# Altium PCB board.PcbDoc
Units mm, origin at the board's own origin, x right, y up, seen from the top; angles counter-clockwise.
Board outline 40.5 x 17.5 mm, 2 copper layers (Top Layer, Bottom Layer); 17 components, 17 nets, 113 pads, 8 vias.
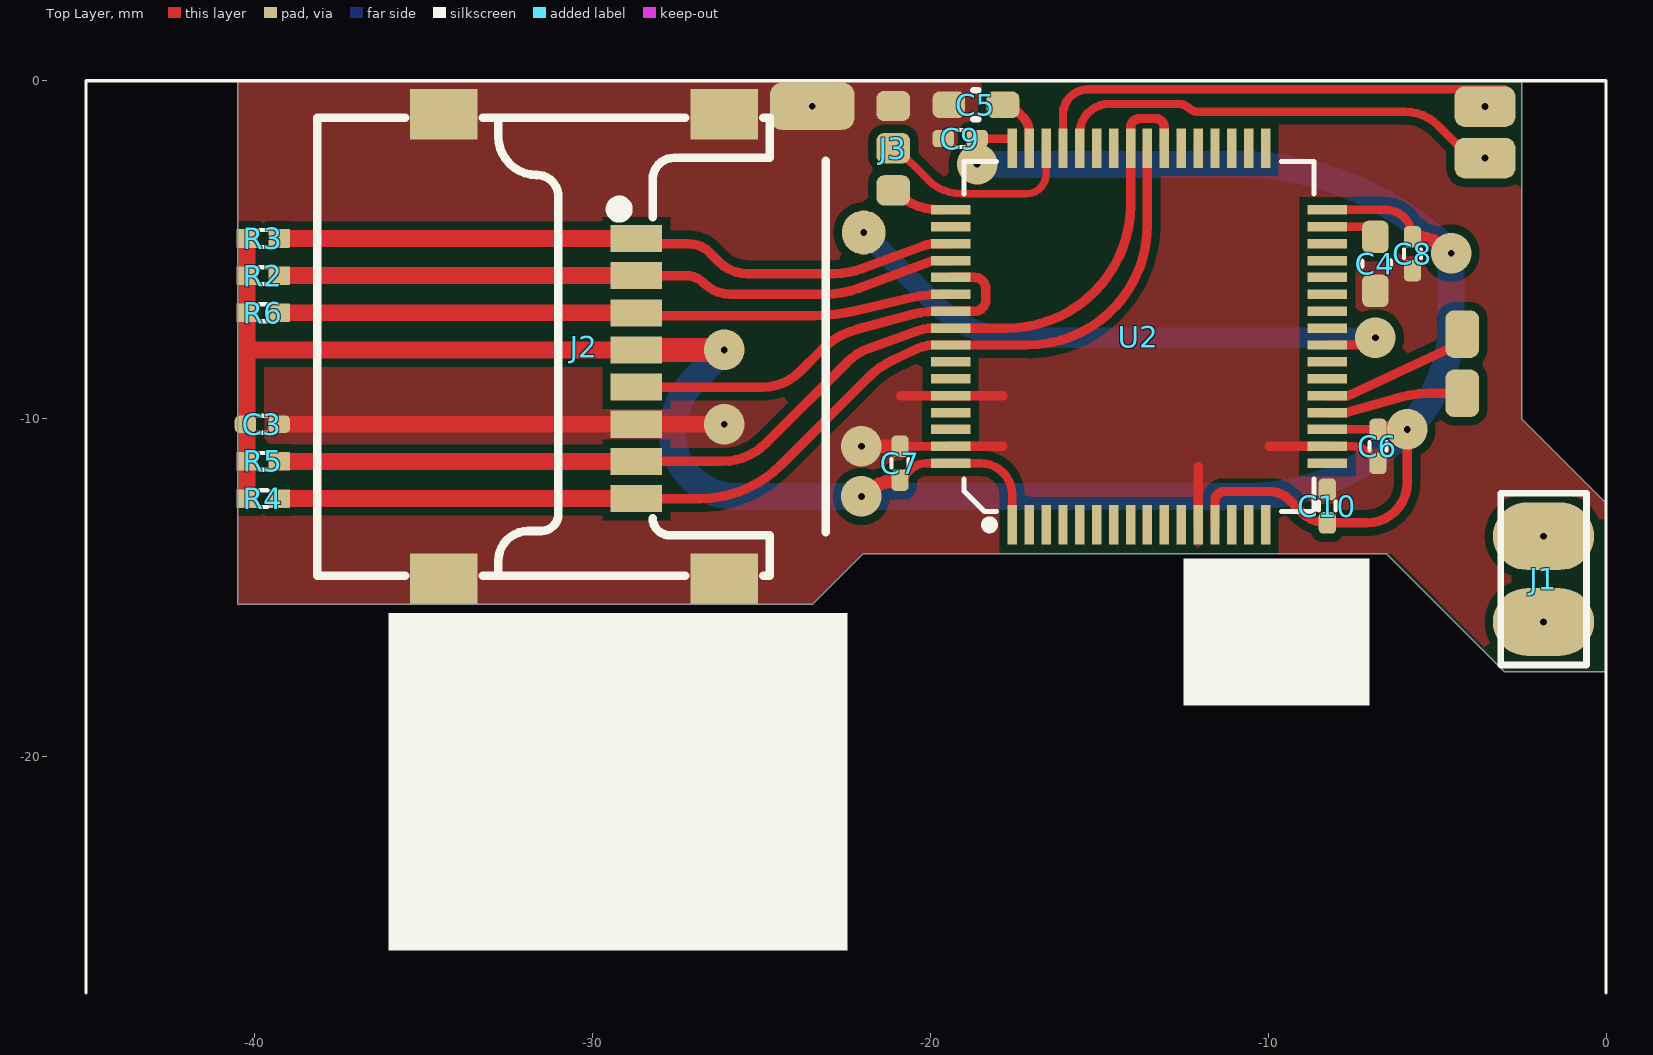
[diagram p0: Top Layer view]
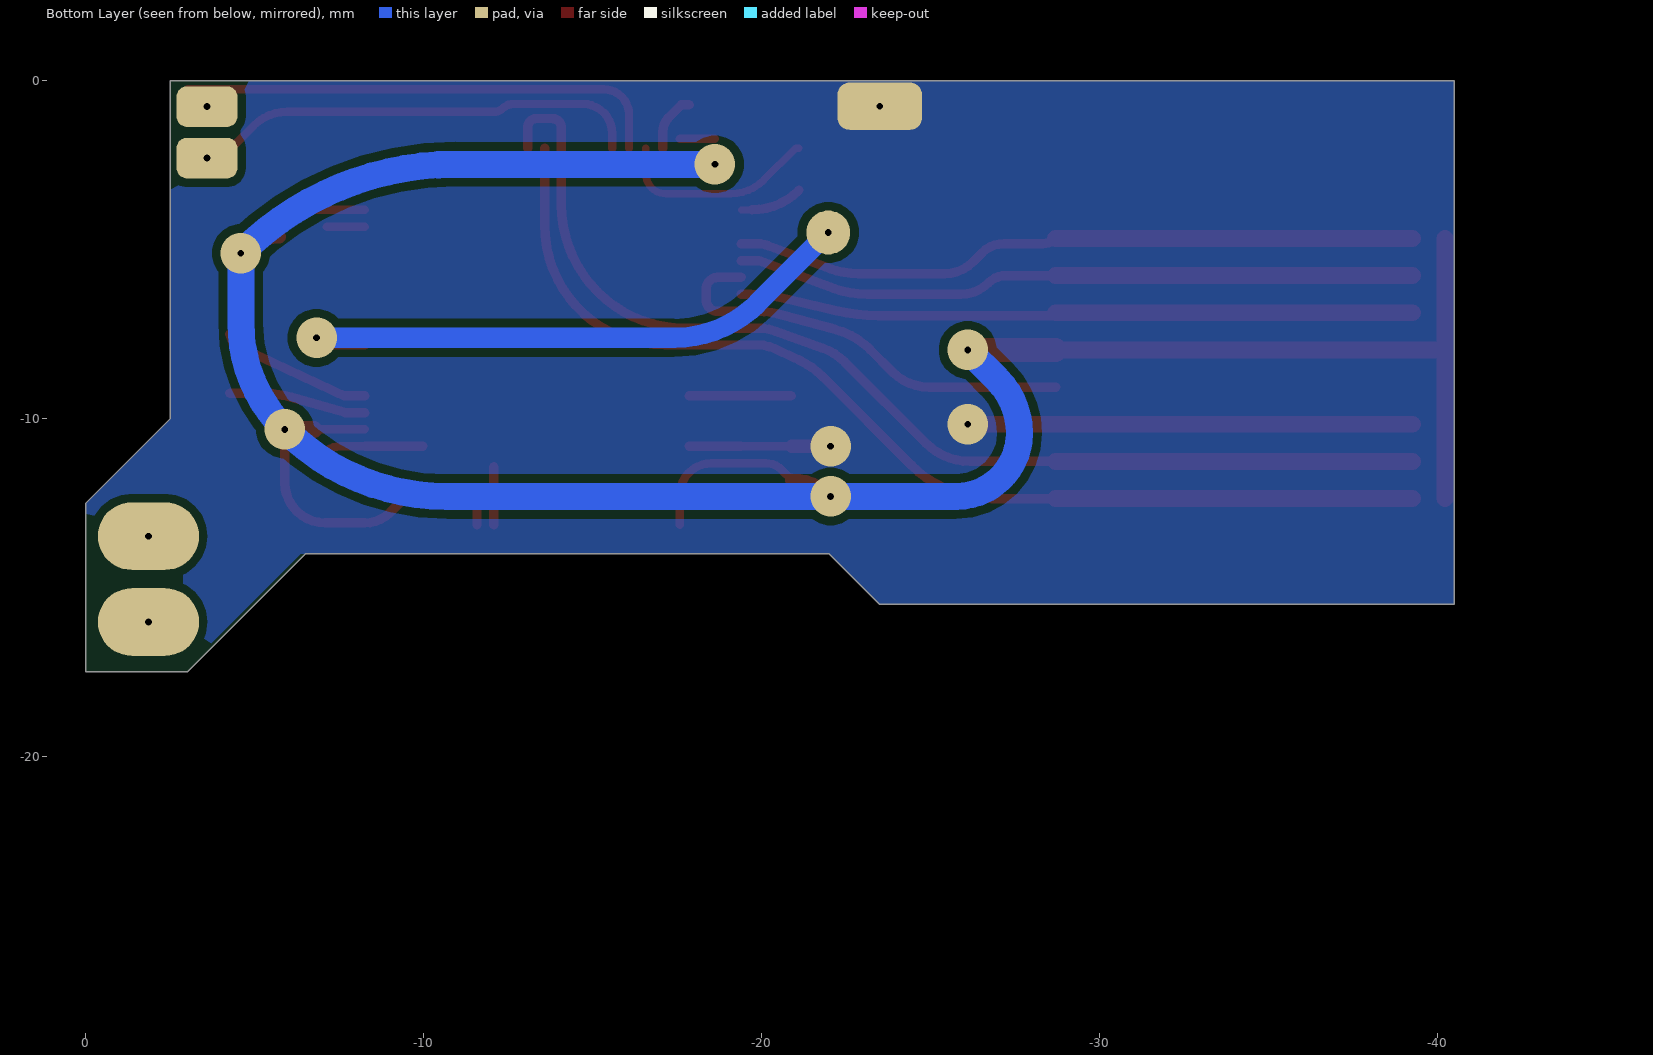
[diagram p1: Bottom Layer view, seen from below]
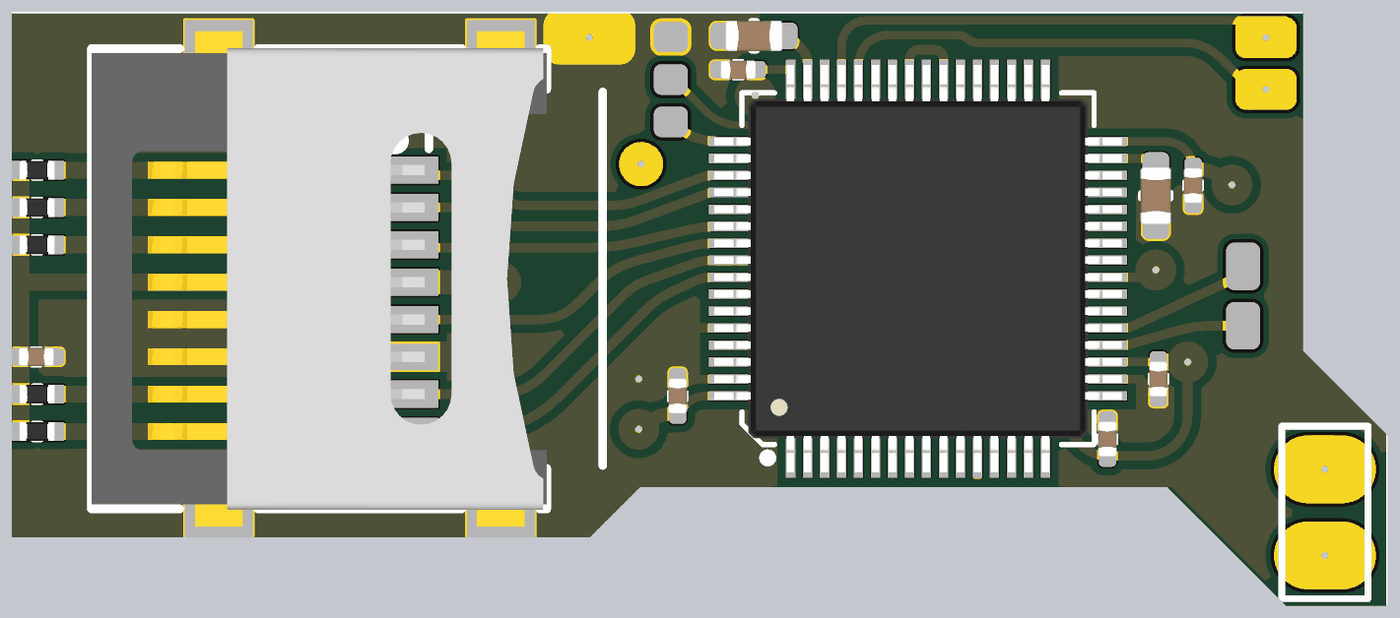
[diagram p2: 3D render of the assembled board from above, using the file's embedded part models]

## Layer stack, top to bottom
Top Solder: solder mask 0.0102, Solder Resist, Dk 3.5
Top Layer: signal copper 0.0356
Dielectric 1: dielectric 0.32, FR-4, Dk 4.8
Bottom Layer: signal copper 0.0356
Bottom Solder: solder mask 0.0102, Solder Resist, Dk 3.5

## Board outline
-40.5,0 -2.5,0 -2.5,-10 0,-12.5 0,-17.5 -3,-17.5 -6.5,-14 -22,-14 -23.5,-15.5 -40.5,-15.5

## Design rules (kind name [scope] priority, off if disabled: settings)
Clearance [All] p1: gap=0.152 ignorepadtopadclearanceinfootprint=FALSE except(0.25: Arc-Fill Arc-Poly Arc-Region Track-Fill Track-Poly Track-Region SMDPad-Fill SMDPad-Poly SMDPad-Region THPad-Fill THPad-Poly THPad-Region Via-Fill Via-Poly Via-Region Fill-Fill Fill-Poly Fill-Region Poly-Poly Poly-Region Region-Region)
ComponentClearance [All] p1: gap=0.254 collisioncheckmode=3 verticalgap=0.254 showdistances=FALSE donotcheckwithout3dbody=TRUE
MinimumSolderMaskSliver [All] p1 off: minsoldermaskwidth=0.254
PolygonConnect [All] p1: connectstyle=Direct reliefconductorwidth=0.254 reliefentries=4 polygonreliefangle="90 Angle" airgapwidth=0.254
RoutingVias [All] p1 off: holewidth=0.711 width=1.27 viastyle="Through Hole" minholewidth=0.711 minwidth=1.27 maxholewidth=0.711 maxwidth=1.27
SilkToSilkClearance [All] p1 off: silktosilkclearance=0.254
SilkToSolderMaskClearance [IsPad] p1 off: minsilkscreentomaskgap=0.254 clearancetoexposedcopper=TRUE
SolderMaskExpansion [All] p1: expansion=0.102 istentingtop=FALSE
SupplyNets "Schematic Supply Nets_1" [InNet('3V3')] p1: voltage=0.000
SupplyNets "Schematic Supply Nets_3" [InNet('GND')] p2: voltage=0.000
Width [All] p1: maxlimit=12.7 minlimit=0.051 preferedwidth=0.254
26 further rules are at their usual default settings.

## Components (designator, comment, footprint, x,y, rotation, side; value= is the part's Value field where it differs from the comment)
C3 "100nF" C0402 -39.778,-10.166 r180 top
C4 "2u2" C0603 -6.827,-5.419 r90 top
C5 "2u2" C0603 -18.653,-0.708 r0 top
C6 "100n" C0402 -6.751,-10.82 r90 top
C7 "100n" C0402 -20.901,-11.32 r270 top
C8 "100n" C0402 -5.728,-5.119 r90 top
C9 "100n" C0402 -19.119,-1.708 r0 top
C10 "100n" C0402 -8.251,-12.588 r270 top
J1 "" HDR-1X2_2.54 -1.85,-14.75 r0 top locked
J2 "TF-102-15" TF-SMD_TF-102-15 -30.254,-7.866 r90 top
J3 "SWD" HDR-1x3-P1.25 -21.101,-1.994 r90 top
R2 "62k" R0402 -39.754,-5.766 r0 top
R3 "62k" R0402 -39.754,-4.666 r0 top
R4 "62k" R0402 -39.754,-12.366 r0 top
R5 "62k" R0402 -39.754,-11.266 r0 top
R6 "62k" R0402 -39.754,-6.866 r0 top
U2 "STM32F205RET6" LQFP-64 -13.826,-7.57 r0 top

## Footprints (in the part's own frame and the unit in brackets; to place one, negate y for a bottom-side part, rotate by r counter-clockwise, add the part's x,y. Pads: shape width x height; smd on the part's side, far side on the other; paste and mask are expansions set on the pad)
C0402 [mm] "Chip Capacitor Body"
  rrect50% 0.635x0.508 smd mask+0.05: 1(-0.5,0) 2(0.5,0)
  silkscreen extent -0.13,-0.25 0.13,0.25, body extent -0.52,-0.27 0.53,0.28, height 0.55
C0603 [mil] "Chip Capacitor"
  rrect50% 38x31 smd mask+1.97: 1(-31.5,0) 2(31.5,0)
  silkscreen extent -3,-17 3,17, body extent -33,-18 33,18, height 35
HDR-1X2_2.54 [mm]
  oval 3x2 hole 0.2: 1(0,1.27) 2(0,-1.27)
  silkscreen extent -1.27,-2.54 1.27,2.54
HDR-1x3-P1.25 [mm]
  rrect50% 0.9x1 smd: 1(-1.25,0) 2(0,0) 3(1.25,0)
LQFP-64 [mil]
  rect 11x46 smd mask+0.98: 1(-147.64,-219.5) 2(-127.95,-219.5) 3(-108.27,-219.5) 4(-88.58,-219.5) 5(-68.9,-219.5) 6(-49.21,-219.5) 7(-29.53,-219.5) 8(-9.84,-219.5) 9(9.84,-219.5) 10(29.53,-219.5) 11(49.21,-219.5) 12(68.9,-219.5) 13(88.58,-219.5) 14(108.27,-219.5) 15(127.95,-219.5) 16(147.64,-219.5) 33(147.64,219.5) 34(127.95,219.5) 35(108.27,219.5) 36(88.58,219.5) 37(68.9,219.5) 38(49.21,219.5) 39(29.53,219.5) 40(9.84,219.5) 41(-9.84,219.5) 42(-29.53,219.5) 43(-49.21,219.5) 44(-68.9,219.5) 45(-88.58,219.5) 46(-108.27,219.5) 47(-127.95,219.5) 48(-147.64,219.5)
  rect 46x11 smd mask+0.98: 17(219.5,-147.64) 18(219.5,-127.95) 19(219.5,-108.27) 20(219.5,-88.58) 21(219.5,-68.9) 22(219.5,-49.21) 23(219.5,-29.53) 24(219.5,-9.84) 25(219.5,9.84) 26(219.5,29.53) 27(219.5,49.21) 28(219.5,68.9) 29(219.5,88.58) 30(219.5,108.27) 31(219.5,127.95) 32(219.5,147.64) 49(-219.5,147.64) 50(-219.5,127.95) 51(-219.5,108.27) 52(-219.5,88.58) 53(-219.5,68.9) 54(-219.5,49.21) 55(-219.5,29.53) 56(-219.5,9.84) 57(-219.5,-9.84) 58(-219.5,-29.53) 59(-219.5,-49.21) 60(-219.5,-68.9) 61(-219.5,-88.58) 62(-219.5,-108.27) 63(-219.5,-127.95) 64(-219.5,-147.64)
  silkscreen extent -204,-224 204,204, body extent -236,-236 236,236, height 59
R0402 [mm]
  rrect10% 0.635x0.55 smd mask+0.05: 1(-0.476,0) 2(0.476,0)
  silkscreen extent -0.12,-0.25 0.13,0.25, body extent -0.52,-0.27 0.53,0.28, height 0.4
TF-SMD_TF-102-15 [mm]
  rect 0.8x1.524 smd paste+0 mask+0.051: 1(3.2,-1.55) 2(2.1,-1.55) 3(1,-1.55) 4(-0.1,-1.55) 5(-1.2,-1.55) 6(-2.3,-1.55) 7(-3.4,-1.55) 8(-4.5,-1.55)
  rect 1.5x2 smd paste+0 mask+0.051: 9(-6.875,4.15) 10(-6.875,-4.15) 11(6.875,4.15) 12(6.875,-4.15)
  silkscreen extent -6.78,-7.15 6.78,7.9, body extent -7.3,-5.5 7.3,7.9, height 1.8

## Part data
C3: library part CAP, LCSC part number=C131394, P/N=CC0402KRX7R9BB104
C4 C5 C6 C7 C8 C9 C10: library part Cap
J1: library part "Header 2"
J3: library part "Header 3"
R2 R3 R4 R5 R6: library part RES_0402_1K5-1%
U2: JLCPCB Part Class="Extended Part", LCSC Part Name="高性能ARM Cortex-M3 MCU，具有512 KB Flash、120 MHz CPU和ART加速器", Manufacturer=ST(意法半导体), Voltage - Supply=1.8V~3.6V, ADC (Bit)=12bit, Add into BOM=yes, Applications=-, Convert to PCB=yes, CPU Core=ARM-M3, CPU Maximum Speed=120MHz, DAC (Bit)=12bit, Datasheet=https://item.szlcsc.com/datasheet/STM32F205RET6/67362.html, Device=STM32F205RET6, Manufacturer Part=STM32F205RET6, Number of I/O=51, Program Memory Type=FLASH, Program Storage Size=512KB, Supplier=LCSC, Supplier Footprint=LQFP-64(10x10), Supplier Part=C66278, Symbol=STM32F205RET6

## Free pads (board coordinates)
  round 1.3 hole 0.2: A(-21.976,-4.489)
  rrect50% 1x1.4 smd: D1(-4.257,-9.25) D2(-4.257,-7.5)
  rrect50% 1.8x1.2 hole 0.2: D1(-3.583,-2.286) D1(-3.583,-0.762)
  rrect50% 2.5x1.4 hole 0.2: M(-23.5,-0.75)

## Via types
v1: diameter 1.2, hole 0.2, Top Layer to Bottom Layer, tented both sides, 8 vias

## Nets (pads, with @x,y where several pads share a name; then routed paths per layer and width w, separated by ;. In a path a pad name is that pad's centre, name@x,y a point inside that pad or via, vN(x,y) a via of type N, cw(c..) or ccw(c..) an arc to the next point about the centre after c; other vN are vias at no path point)
3V3: C3.2 C6.2 C7.2 C8.2 C9.2 C10.2 J2.4 R2.1 R3.1 R4.1 R5.1 R6.1 U2.1 U2.13 U2.19 U2.32 U2.48 U2.64 | length 91.4
  Top Layer w0.25: C7.2 -20.595,-11.514 cw(c-20.127,-11.982) -20.127,-11.32 U2.64 -18.518,-11.32 cw(c-18.518,-12.262) -17.576,-12.262 U2.1 ; C9.2 U2.48@-17.582,-1.708 ; U2.19 C6.2 ; U2.32 -6.528,-3.82 cw(c-6.528,-4.619) -5.728,-4.616 cw(c-6.528,-4.619) C8.2
  Top Layer w0.28: U2.13 -11.576,-12.43 cw(c-11.303,-12.43) -11.303,-12.157 -9.961,-12.157 cw(c-9.961,-12.973) -9.385,-12.396 -9.004,-12.777 ccw(c-8.251,-12.023) C10.2 -7.083,-13.088 ccw(c-7.083,-11.893) -5.888,-11.893 v1(-5.888,-10.32)
  Top Layer w0.4: v1@-22.028,-12.287 cw(c-20.901,-13.414) C7.2 ; C8.2 cw(c-5.728,-6.213) v1@-4.601,-5.086
  Top Layer w0.5: R4.1 R5.1 -40.23,-7.966 ; R3.1 R2.1 R6.1 -40.23,-7.966 ; J2.4 -40.23,-7.966 ; C6.2 v1(-5.888,-10.32)
  Top Layer w0.7: J2.4 v1(-26.104,-7.966)
  Bottom Layer w0.8: v1(-26.104,-7.966) -26.975,-8.837 ccw(c-25.381,-10.432) -27.635,-10.432 ccw(c-25.765,-10.432) -25.765,-12.302 v1(-22.044,-12.302) -10.674,-12.302 ccw(c-10.674,-5.533) v1(-5.888,-10.32) ccw(c-9.033,-7.175) -4.585,-7.175 v1(-4.585,-5.102) ccw(c-10.939,-11.456) -10.939,-2.47 v1(-18.619,-2.47)
CAN_RX: pad.D1@-3.583,-2.286 U2.44 | length 13.5
  Top Layer w0.25: U2.44 -15.576,-1.549 cw(c-14.713,-1.549) -14.713,-0.686 -12.637,-0.686 cw(c-12.637,-1.083) -12.356,-0.802 ccw(c-12.075,-0.521) -12.075,-0.918 -5.943,-0.918 cw(c-5.943,-2.296) -4.969,-1.322 -4.005,-2.286 pad.D1@-3.583,-2.286
CAN_TX: pad.D1@-3.583,-0.762 U2.45 | length 14.5
  Top Layer w0.25: U2.45 -16.076,-0.989 cw(c-15.342,-0.989) -15.342,-0.254 pad.D1@-3.02,-0.254
DAC1: pad.D1@-4.257,-9.25 U2.20 | length 4.1
  Top Layer w0.28: U2.20 -7.684,-9.82 -6.091,-9.368 cw(c-5.239,-12.374) -5.239,-9.25 pad.D1@-4.257,-9.25
DAC2: pad.D2 U2.21 | length 4.5
  Top Layer w0.28: U2.21 -7.635,-9.32 -4.365,-7.797 pad.D2
GND: C3.1 C4.1 C5.1 C6.1 C7.1 C8.1 C9.1 C10.1 J2.6 J2.9 J2.10 J2.11 J2.12 J3.3 pad.M U2.12 U2.18 U2.60 U2.63 | length 25.5
  Top Layer w0.25: C7.1 U2.63 ; U2.18 -7.526,-10.82 cw(c-7.526,-11.482) -7.057,-11.014 C6.1
  Top Layer w0.28: -20.878,-9.32 U2.60 -17.854,-9.32 ; U2.63 -17.854,-10.82 ; U2.12 -12.076,-11.43 ; -9.966,-10.82 U2.18
  Top Layer w0.4: v1(-22.044,-10.82) C7.1
  Top Layer w0.5: C3.1 J2.6 v1(-26.104,-10.166)
NetC4_2: C4.2 U2.31 | length 1.1
  Top Layer w0.25: U2.31 C4.2@-7.126,-4.32
NetC5_2: C5.2 U2.47 | length 1.7
  Top Layer w0.28: C5.2 -17.629,-0.708 -17.255,-1.082 cw(c-17.685,-1.513) -17.076,-1.513 U2.47
SDIO_CLK: J2.5 U2.53 U2.55 | length 12.7
  Top Layer w0.28: J2.5 -24.962,-9.066 ccw(c-24.962,-7.525) -23.873,-8.615 -23.216,-7.958 cw(c-21.565,-9.61) -22.174,-7.355 -20.524,-6.908 cw(c-19.854,-9.382) -19.854,-6.82 U2.55 -18.691,-6.82 ccw(c-18.691,-6.492) -18.364,-6.492 -18.364,-6.147 ccw(c-18.691,-6.147) -18.691,-5.82 U2.53
SDIO_CMD: J2.3 R6.2 U2.54 | length 20
  Top Layer w0.28: J2.3 -28.622,-6.948 -23.434,-6.948 ccw(c-23.434,-1.639) -22.214,-6.806 -20.613,-6.428 cw(c-19.681,-10.372) -19.681,-6.32 U2.54
  Top Layer w0.5: R6.2 J2.3
SDIO_D0: J2.7 R5.2 U2.39 U2.41 U2.56 | length 32.8
  Top Layer w0.28: J2.7 -26.169,-11.266 ccw(c-26.169,-9.419) -24.863,-10.725 -22.459,-8.321 cw(c-21.246,-9.534) -21.826,-7.92 -20.395,-7.406 cw(c-19.897,-8.796) -19.897,-7.32 U2.56 -17.732,-7.32 ccw(c-17.732,-3.664) -14.076,-3.664 U2.41 -14.076,-1.394 cw(c-13.797,-1.394) -13.797,-1.115 -13.345,-1.115 cw(c-13.345,-1.384) -13.076,-1.384 U2.39
  Top Layer w0.5: R5.2 J2.7
SDIO_D1: J2.8 R4.2 U2.40 U2.57 | length 31.6
  Top Layer w0.28: J2.8 -26.813,-12.366 ccw(c-26.813,-9.014) -24.443,-11.384 -21.832,-8.774 cw(c-20.004,-10.601) -21.095,-8.258 -20.391,-7.93 cw(c-19.892,-9) -19.892,-7.82 U2.57 -17.131,-7.82 ccw(c-17.131,-4.264) -13.576,-4.264 U2.40
  Top Layer w0.5: R4.2 J2.8
SDIO_D2: J2.1 R3.2 U2.51 | length 20.3
  Top Layer w0.28: J2.1 ccw(c-28.334,-4.296) -28.334,-4.82 -27.17,-4.82 cw(c-27.17,-5.716) -26.537,-5.082 -26.256,-5.363 ccw(c-25.419,-4.526) -25.419,-5.709 -22.856,-5.709 ccw(c-22.856,-3.323) -22.024,-5.559 -20.201,-4.881 cw(c-19.861,-5.793) -19.861,-4.82 U2.51
  Top Layer w0.5: R3.2 J2.1
SDIO_D3: J2.2 R2.2 U2.52 | length 20.2
  Top Layer w0.28: J2.2 -27.24,-5.766 cw(c-27.24,-6.523) -26.705,-5.988 ccw(c-25.904,-5.187) -25.904,-6.32 -23.128,-6.32 ccw(c-23.128,-3.407) -22.112,-6.137 -19.917,-5.32 U2.52
  Top Layer w0.5: R2.2 J2.2
SWCLK: J3.1 U2.49 | length 1.9
  Top Layer w0.2: U2.49@-19.712,-3.82 U2.49
  Top Layer w0.28: J3.1 ccw(c-19.712,-1.855) U2.49@-19.712,-3.82
SWDIO: J3.2 U2.46 | length 6.1
  Top Layer w0.22: J3.2 -21.008,-1.994 -20.069,-2.933 ccw(c-19.083,-1.947) -19.083,-3.342 -17.159,-3.342 ccw(c-17.159,-2.759) -16.576,-2.759 U2.46
Vin: pad.A U2.24 | length 17.8
  Top Layer w0.28: U2.24 -7.038,-7.82 v1(-6.827,-7.608)
  Bottom Layer w0.6: pad.A -19.878,-6.587 ccw(c-17.412,-4.121) -17.412,-7.608 v1(-6.827,-7.608)
pads on no net: J1.1 J1.2 U2.2 U2.3 U2.4 U2.5 U2.6 U2.7 U2.8 U2.9 U2.10 U2.11 U2.14 U2.15 U2.16 U2.17 U2.22 U2.23 U2.25 U2.26 U2.27 U2.28 U2.29 U2.30 U2.33 U2.34 U2.35 U2.36 U2.37 U2.38 U2.42 U2.43 U2.50 U2.58 U2.59 U2.61 U2.62

## Polygon pours and split planes (outlines as drawn)
GND on Top Layer "GND_L01_P000" (solid, remove dead copper, pour order 0): -2.5,0 -2.5,-10 0,-12.5 0,-17.5 -2.865,-17.5 -6.365,-14 -22,-14 -23.5,-15.5 -40.5,-15.5 -40.5,0
GND on Bottom Layer "GND_L02_P001" (solid, remove dead copper, pour order 1): -2.5,0 -2.5,-10 0,-12.5 0,-17.5 -2.865,-17.5 -6.365,-14 -22,-14 -23.5,-15.5 -40.5,-15.5 -40.5,0

## Silkscreen, mask and mechanical layers (free items; w line width, h text height)
Top Overlay:
  rectangle: -36.05,-25.75 -22.45,-15.75
  rectangle: -12.507,-18.498 -7.007,-14.145
  lines w0.1: -45,-27 -45,0 0,0 0,-27